# EAGLE board EEZ DIB module template (isolated) (EAGLE 7.2.0)
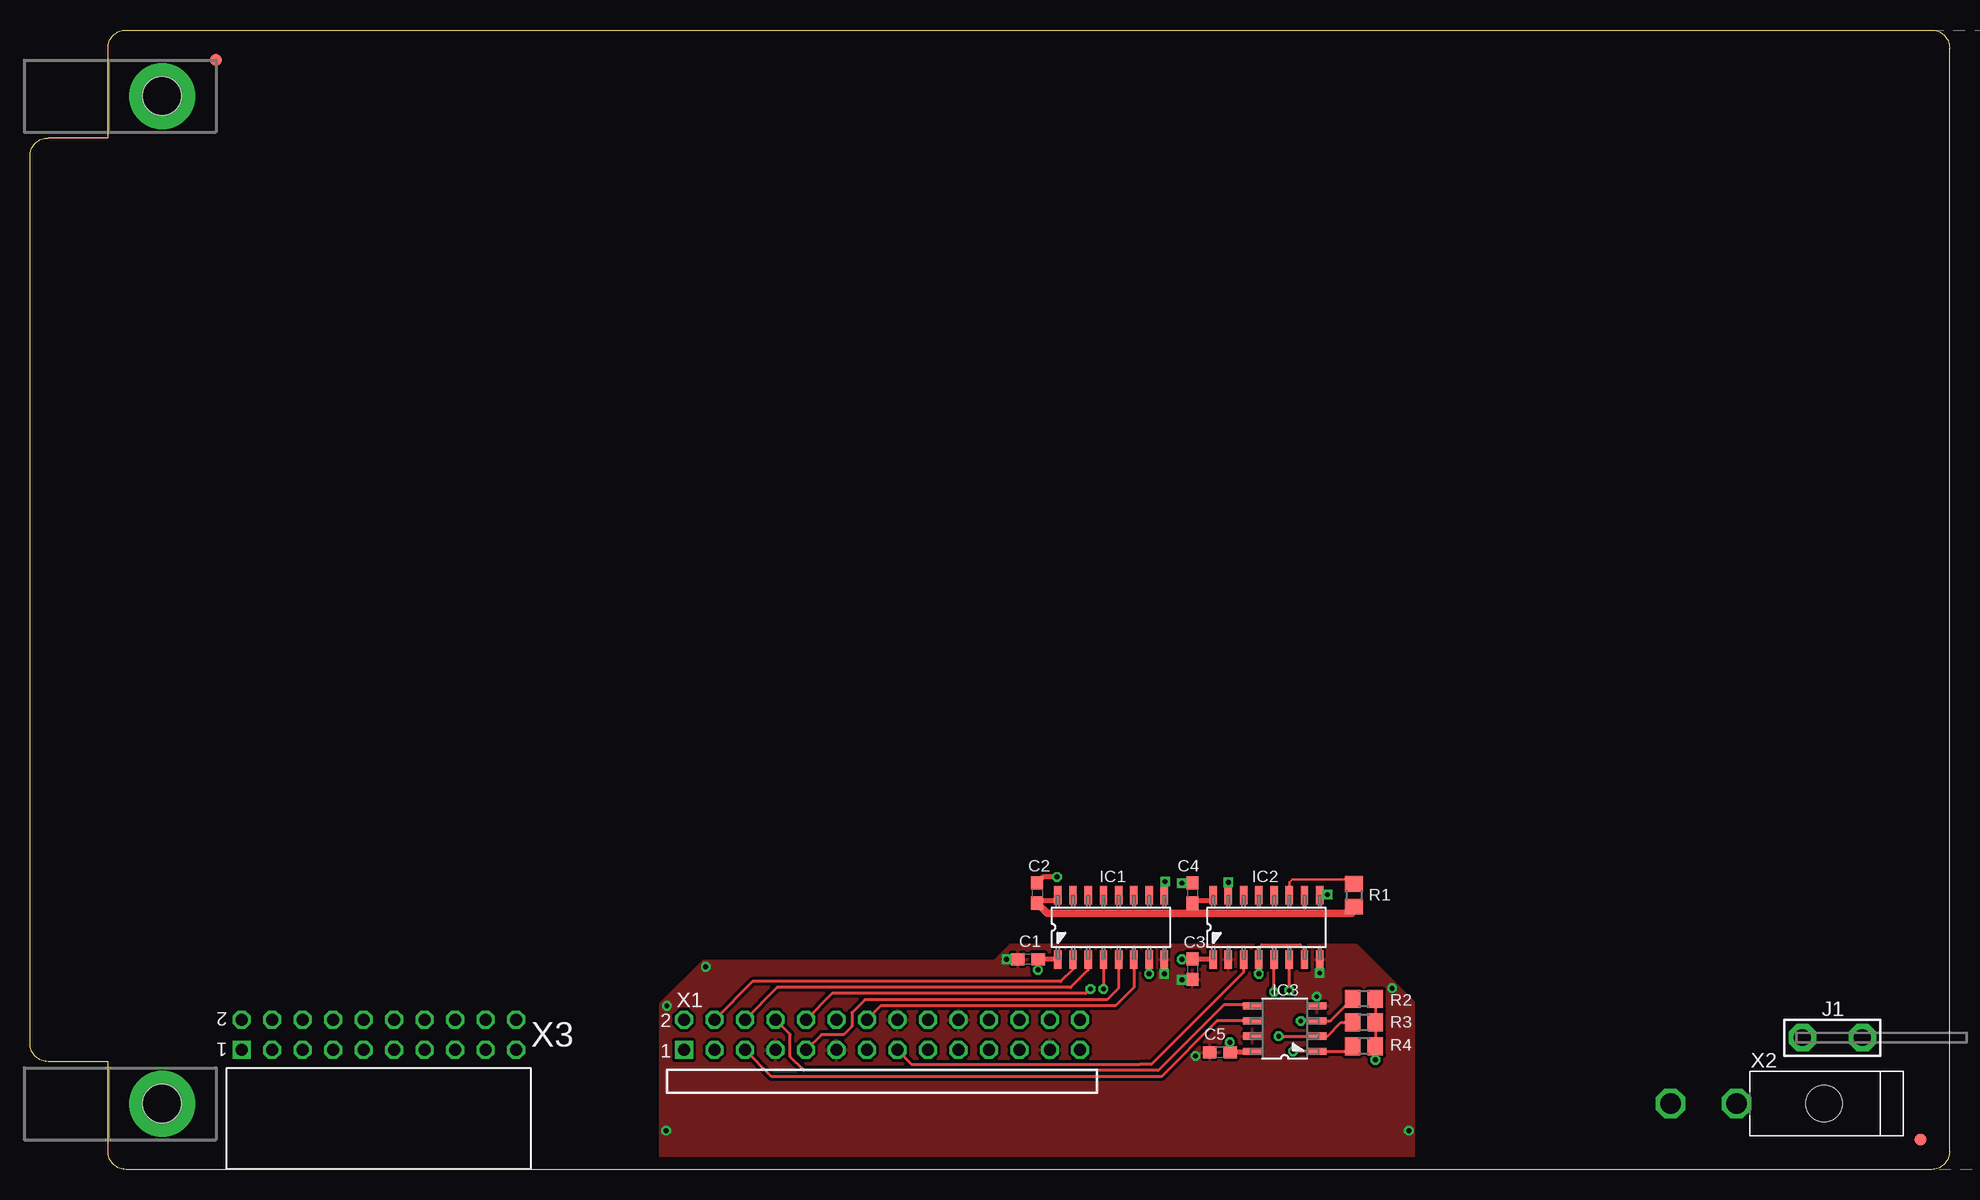
[diagram p0: board, top side]
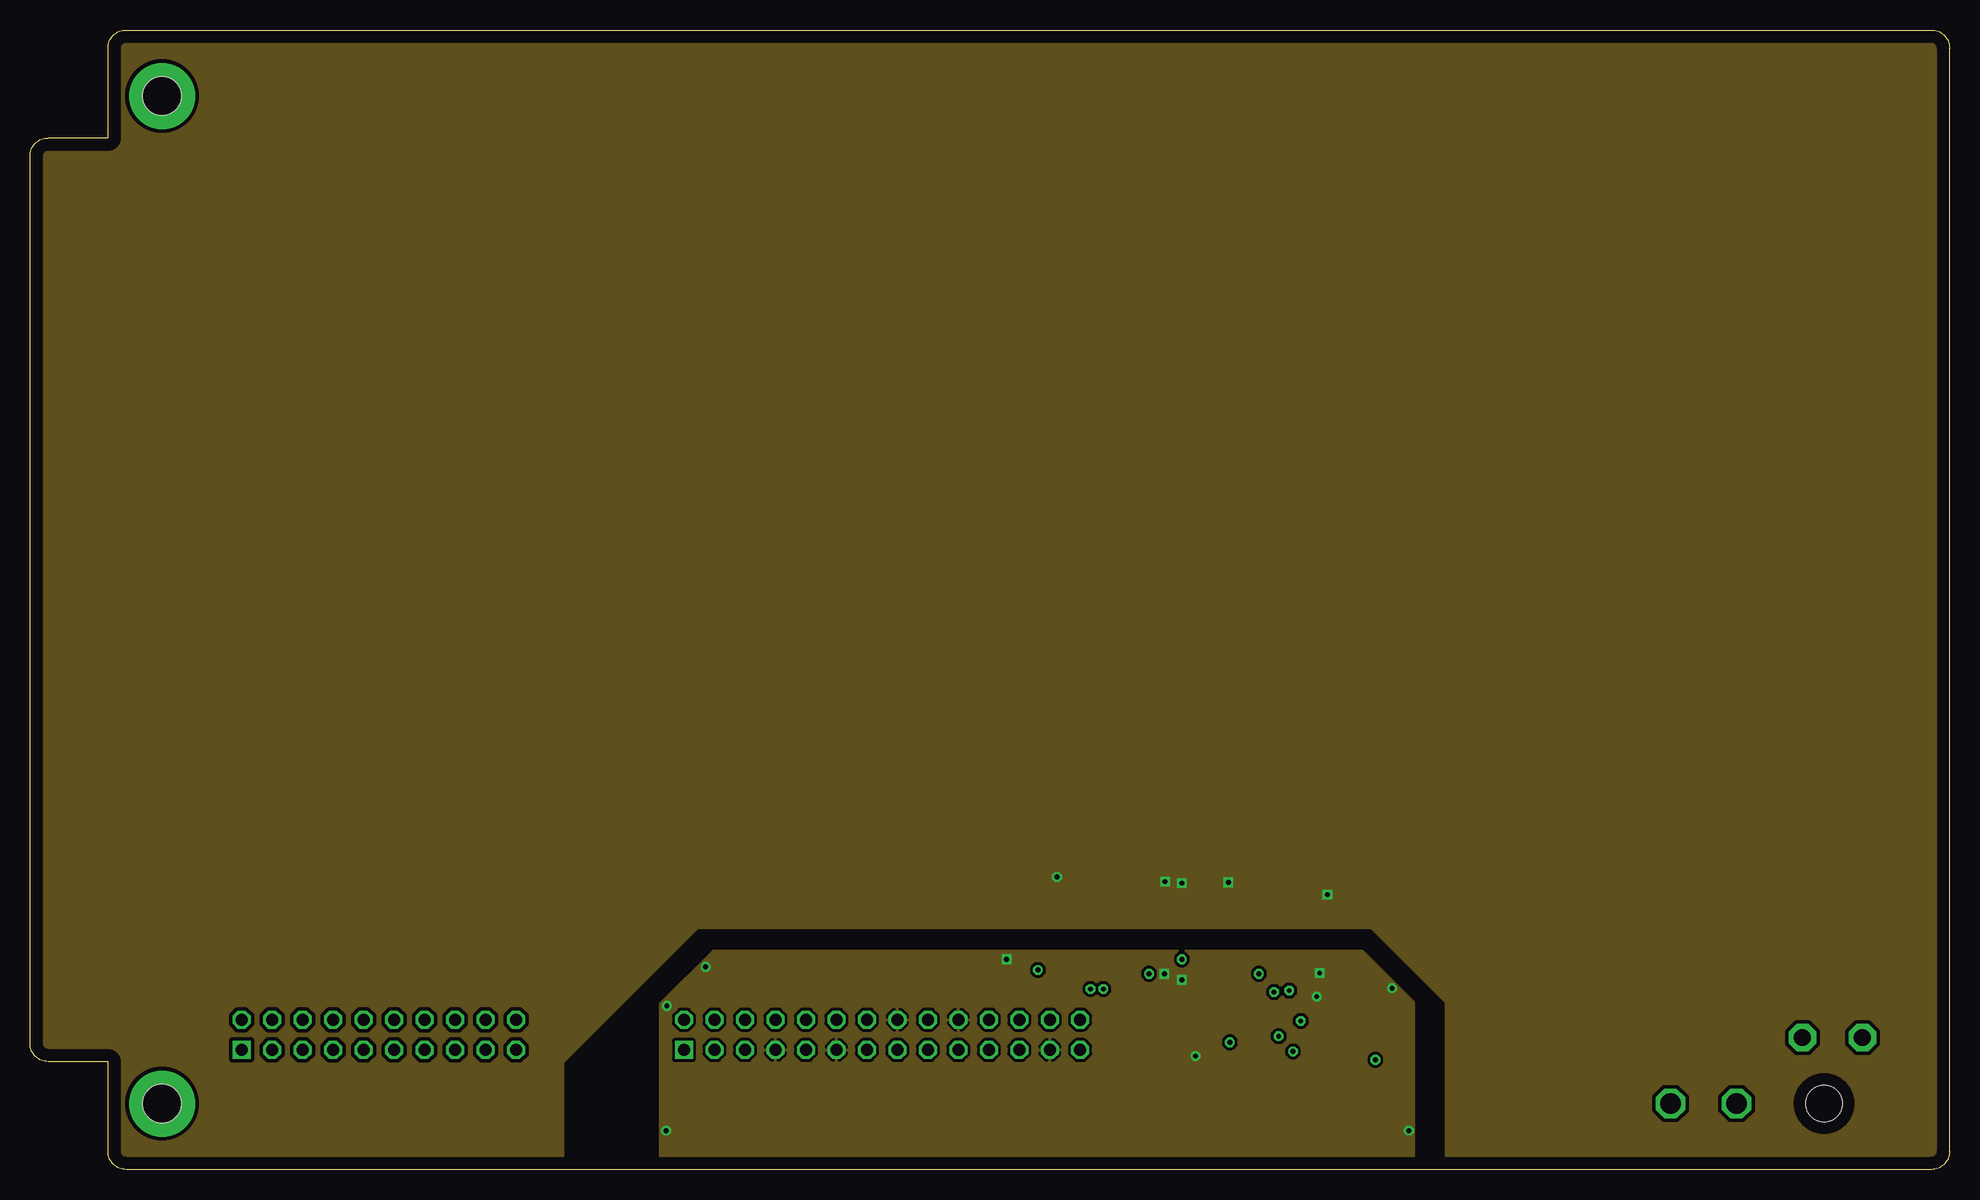
[diagram p1: board, inner layer L2]
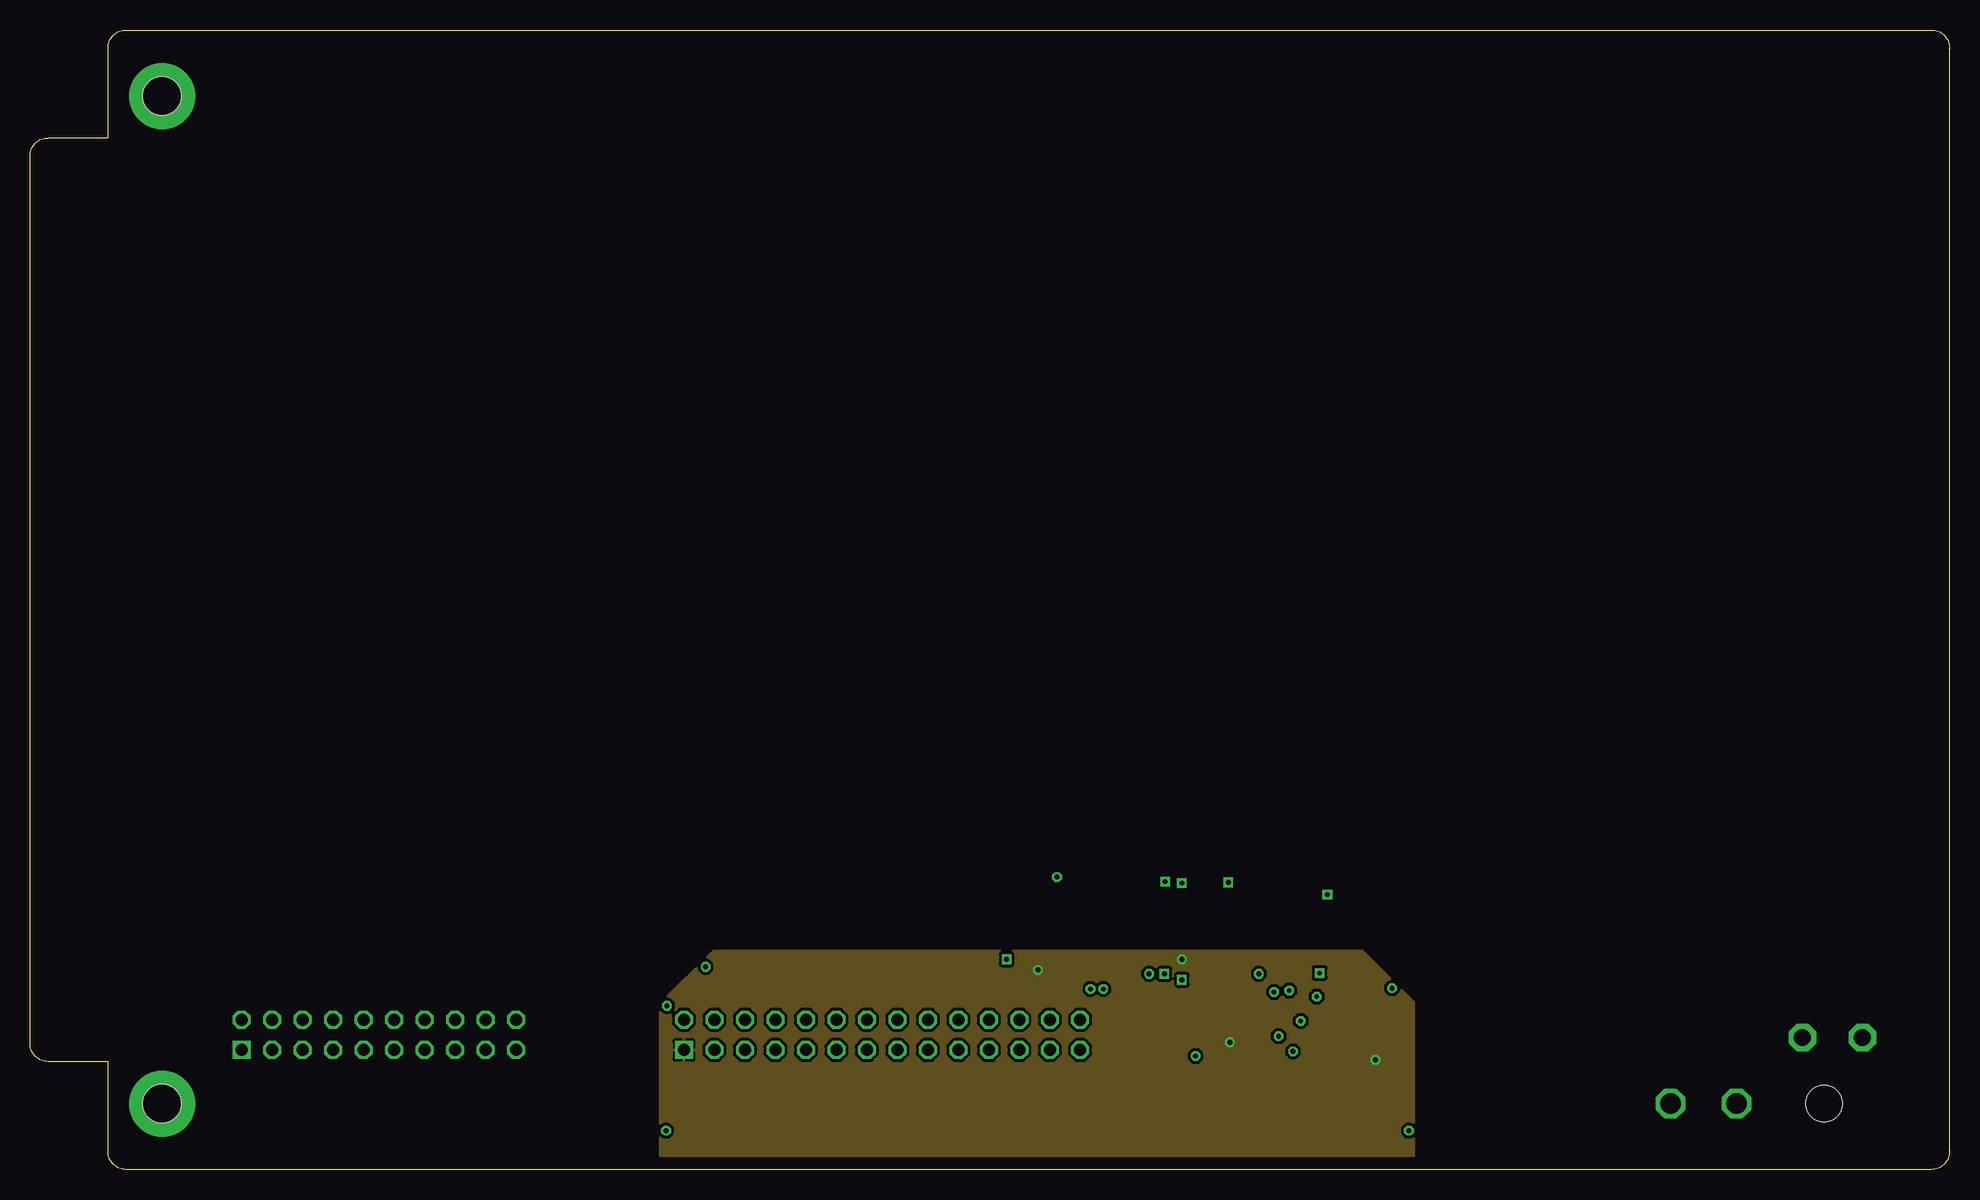
[diagram p2: board, inner layer L3]
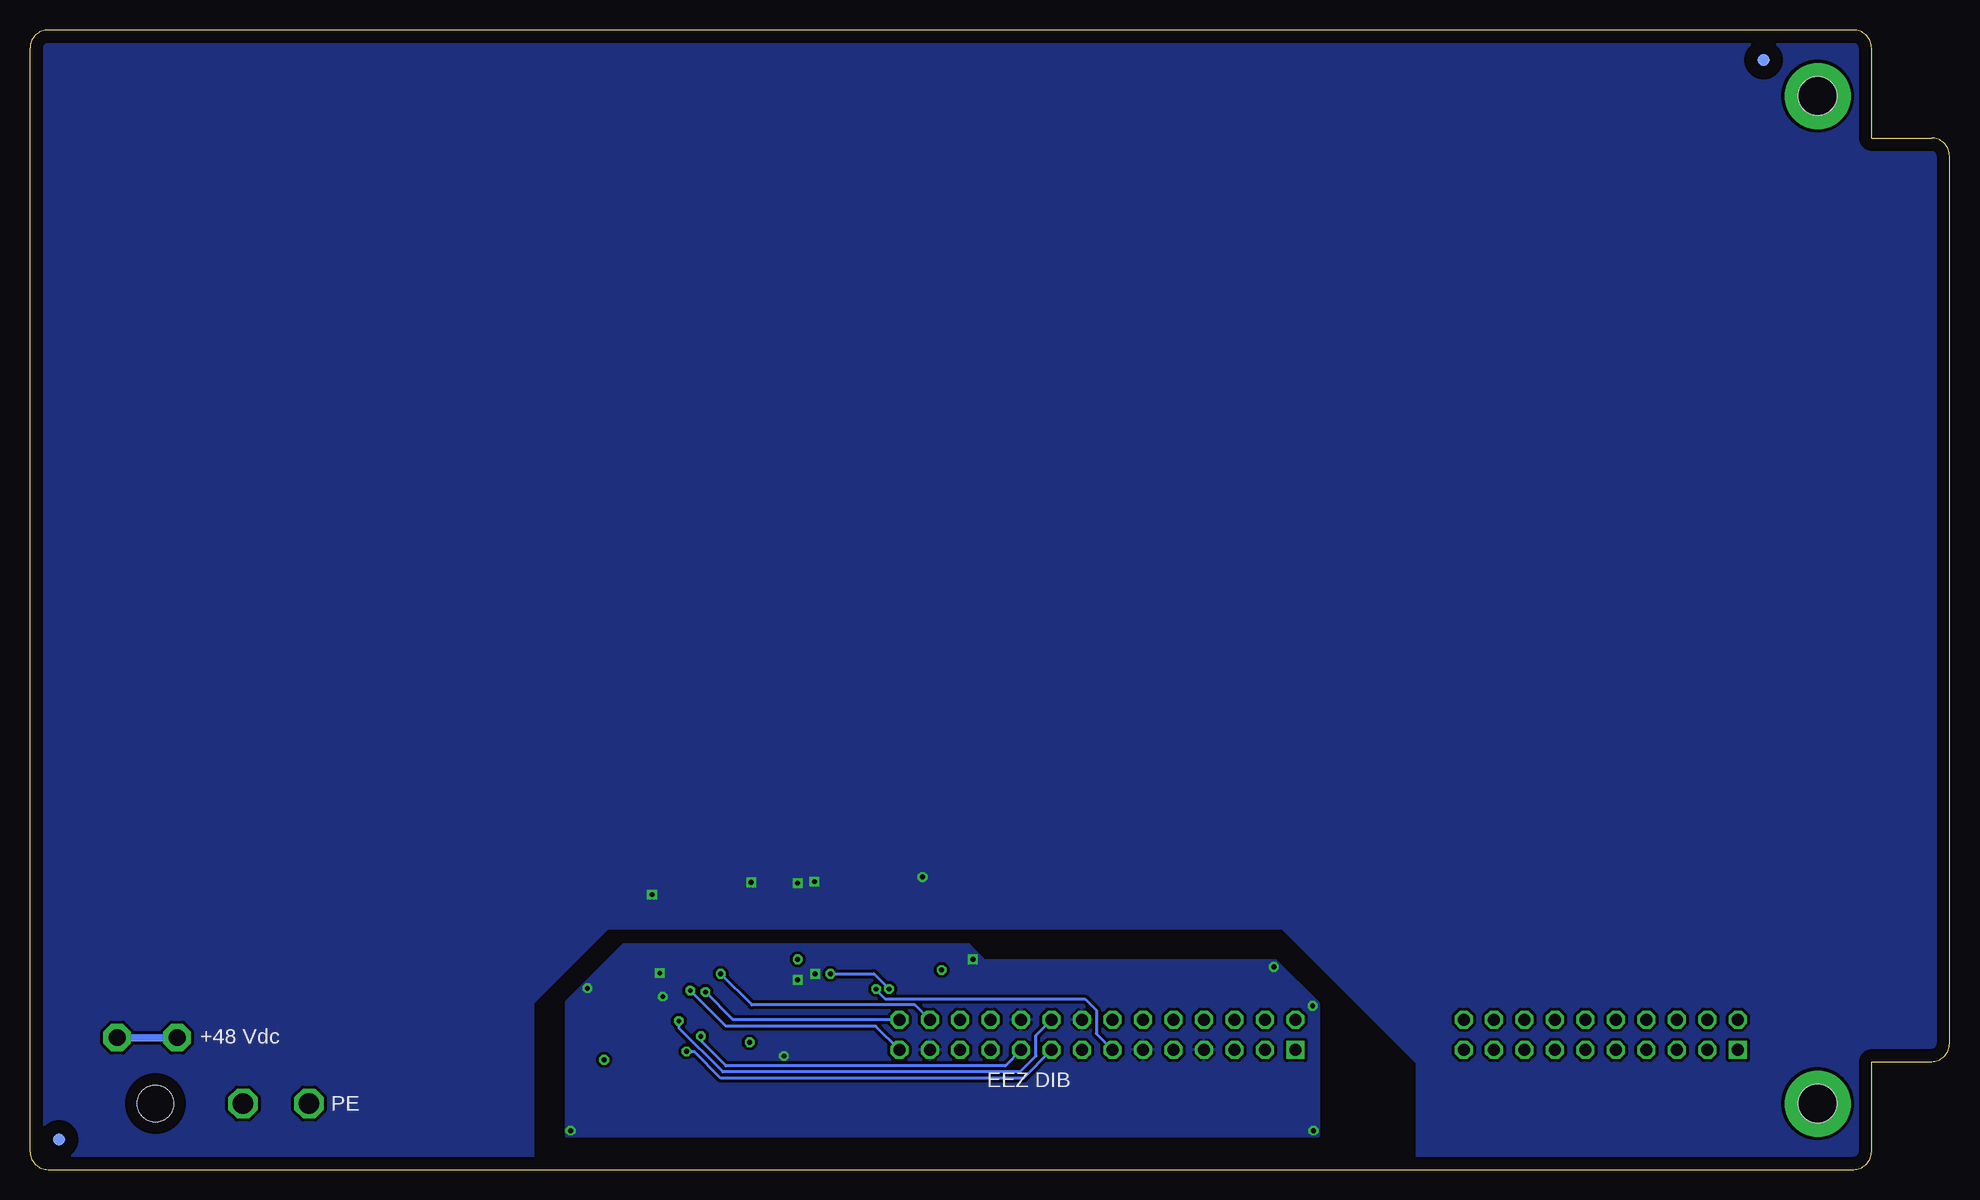
[diagram p3: board, bottom side, seen from below]

Size 160 x 95 mm. Coordinates in mm from the lower left corner, seen from the top.
Outline: 8,95 158.5,95 arc-90 160,93.5 160,1.5 arc-90 158.5,0 158,0 8,0 arc-90 6.5,1.5 6.5,9 1.5,9 arc-90 0,10.5 0,84.5 arc-90 1.5,86 6.5,86 6.5,93.5 arc-90 8,95
Copper layers (1+2+15+16): Top 0.035mm / dielectric 7mil / L2 0.03mm / dielectric 44mil / L3 0.03mm / dielectric 7mil / Bottom 0.035mm
Design rules "default *": minimum track width 6mil, minimum drill 0.3mm, track to track 6mil, track to pad 6mil, pad to pad 6mil, via to via 6mil, smd to smd 6mil, copper to edge 40mil, drill to drill 8mil, minimum pad ring 4mil, minimum via ring 8mil, stop-mask expansion 2.5mil, vias tented up to drill 1mm, thermal gap 8mil
Net classes: 0 default: width 0.203 mm, drill 0.3 mm, clearance 0.203 mm; 1 lvds: width 0.152 mm, drill 0.3 mm, clearance 0.152 mm to class 0, clearance 0.152 mm; 2 gnd: width 0.254 mm, drill 0.584 mm, clearance 0.254 mm
vRestrict: area 53,0 to 128,8.5

## Footprints (pad centres in the part's own frame; a part is rotated, then mirrored left to right if it is on the bottom)
C0603 = smd 1.1 x 1: 1 -0.85,0; 2 0.85,0
FIDUCIAL_DUAL = smd 1.016 x 1.016 bottom: B 0,0 | smd 1.016 x 1.016: T 0,0
SOIC-16 = smd 1.549 x 0.61: 1 -2.692,4.445; 2 -2.692,3.175; 3 -2.692,1.905; 4 -2.692,0.635; 5 -2.692,-0.635; 6 -2.692,-1.905; 7 -2.692,-3.175; 8 -2.692,-4.445; 9 2.692,-4.445; 10 2.692,-3.175; 11 2.692,-1.905; 12 2.692,-0.635; 13 2.692,0.635; 14 2.692,1.905; 15 2.692,3.175; 16 2.692,4.445
SOIC127P600X173-8N = smd 1.55 x 0.6: 1 -2.7,1.9; 2 -2.7,0.63; 3 -2.7,-0.64; 4 -2.7,-1.91; 5 2.7,-1.91; 6 2.7,-0.64; 7 2.7,0.63; 8 2.7,1.9
PCB_TAB-4907 = drill 1.4 pad 2.3 octagon: 1 -2.5,0; 2 2.5,0
PCB-MB = hole 3.2: 0,0
R0805 = smd 1.3 x 1.5: 1 -0.95,0; 2 0.95,0
77317-104-28LF = drill 1 pad 1.5 square: 1 -33.02,-2.54 | drill 1 pad 1.5 octagon: 2 -33.02,0; 3 -30.48,-2.54; 4 -30.48,0; 5 -27.94,-2.54; 6 -27.94,0; 7 -25.4,-2.54; 8 -25.4,0; 9 -22.86,-2.54; 10 -22.86,0; 11 -20.32,-2.54; 12 -20.32,0; 13 -17.78,-2.54; 14 -17.78,0; 15 -15.24,-2.54; 16 -15.24,0; 17 -12.7,-2.54; 18 -12.7,0; 19 -10.16,-2.54; 20 -10.16,0; 21 -7.62,-2.54; 22 -7.62,0; 23 -5.08,-2.54; 24 -5.08,0; 25 -2.54,-2.54; 26 -2.54,0; 27 0,-2.54; 28 0,0
MINIFIT_39301020 = drill 1.7 octagon: 1 0,0; 2 0,5.5 | hole 3: 0,-7.3
SSW-110-02-T-D-RA = drill 1 pad 1.5 square: 1 22.86,2.54 | drill 1 pad 1.5 octagon: 2 22.86,0; 3 20.32,2.54; 4 20.32,0; 5 17.78,2.54; 6 17.78,0; 7 15.24,2.54; 8 15.24,0; 9 12.7,2.54; 10 12.7,0; 11 10.16,2.54; 12 10.16,0; 13 7.62,2.54; 14 7.62,0; 15 5.08,2.54; 16 5.08,0; 17 2.54,2.54; 18 2.54,0; 19 0,2.54; 20 0,0

## Placement (x,y rotation side)
C1  100n  [C0603]  83.19,17.53 180 top
C2  100n  [C0603]  83.95,23.05 270 top
C3  100n  [C0603]  96.9,16.7 270 top
C4  100n  [C0603]  96.9,23.05 270 top
C5  100n  [C0603]  99.19,9.78 0 top
FM1  FIDUCIAL_2  [FIDUCIAL_DUAL]  15.5,92.5 0 top
FM2  FIDUCIAL_2  [FIDUCIAL_DUAL]  157.58,2.5 0 top
IC1  Si8662AB-B-IS1  [SOIC-16]  90.11,20.19 90 top
IC2  Si8641AB-B-IS1  [SOIC-16]  103.06,20.19 90 top
IC3  M24C32-WMN6P  [SOIC127P600X173-8N]  104.58,11.75 180 top
J1  4907  [PCB_TAB-4907]  150.24,11 180 top
KK1  PMB-1  [PCB-MB]  11,89.5 0 top
KK2  PMB-1  [PCB-MB]  11,5.5 0 top
R1  10K  [R0805]  110.36,22.86 270 top
R2  10K  [R0805]  111.19,14.22 180 top
R3  10K  [R0805]  111.19,12.26 180 top
R4  10K  [R0805]  111.19,10.29 180 top
X1  77317-104-28LF  [77317-104-28LF]  87.54,12.5 0 top
X2  39-30-1020  [MINIFIT_39301020]  142.24,5.5 90 top
X3  ZL263-20DG  [SSW-110-02-T-D-RA]  40.5,12.5 180 top

## Library data of the parts
C1-C5 R1-R4 = rcl
FM1 FM2 IC1-IC3 KK1 KK2 = EEZ_Lib1
J1 X1-X3 = EEZ_connectors

## Nets
!RESET: IC1.15
+3V3: C2.2 C4.2 IC1.16 IC2.10 IC2.16 R1.2
+VAUX: X1.2
BOOT0: IC2.13
DIB_A0: IC3.1 R4.2 X1.17
DIB_A1: IC3.2 R3.2 X1.19
DIB_A2: IC3.3 R2.2 X1.18
DIB_BOOT0: IC2.4 IC2.7 X1.26
DIB_CSA: IC1.5 X1.9
DIB_CSB: X1.12
DIB_IRQ: IC1.7 X1.10
DIB_MISO: IC1.6 X1.14
DIB_MOSI: IC2.3 X1.15
DIB_NFAULT: X1.3
DIB_NRESET: IC1.2 X1.4
DIB_SCL: IC3.6 X1.5
DIB_SCLK: IC1.4 X1.13
DIB_SDA: IC3.5 X1.8
DIB_SYNC: IC1.3 X1.6
DIB_UART_RX: IC2.6 X1.27
DIB_UART_TX: IC2.5 X1.28
GND: C2.1 C4.1 IC1.9 IC2.9 IC2.15
GNDIO: C1.2 C3.2 C5.1 IC1.8 IC2.2 IC2.8 IC3.4 IC3.7 X1.7 X1.11 X1.16 X1.20 X1.25
IRQ: IC1.10
MISO: IC1.11
MOSI: IC2.14
NSS: IC1.12
OE_SYNC: IC1.14
PE: J1.1 J1.2
SCLK: IC1.13
UART_RX: IC2.12
UART_TX: IC2.11 R1.1
V+: C1.1 C3.1 C5.2 IC1.1 IC2.1 IC3.8 R2.1 R3.1 R4.1 X1.1

## Tracks (layer width: path | path; a pad name or v marks a point on that pad's centre or on a via)
+3V3
  Top 0.254: R1.2 110.36,21.59 110.3,21.4 110.24,21.4 110.17,21.34 | IC2.10 106.24,21.4 106.17,21.34
  Top 0.406: IC2.16 98.61,22.35 98.58,22.39 97.09,22.39 C4.2 96.9,21.34 | IC1.16 85.66,22.42 84.16,22.42 C2.2
  Top 0.61: 110.17,21.34 106.17,21.34 96.9,21.34 84.8,21.34 C2.2
DIB_A0  (via drill 0.4)
  Top 0.254: v105.28,9.84 IC3.1 109.8,9.85 R4.2
  Bottom 0.254: X1.17 77.18,7.62 102.42,7.62 104.65,9.84 v105.28,9.84
DIB_A1  (via drill 0.4)
  Top 0.254: v104.08,11.11 IC3.2 108.14,11.12 109.28,12.26 R3.2
  Bottom 0.254: X1.19 78.7,8.64 101.98,8.64 104.08,10.73 v104.08,11.11
DIB_A2  (via drill 0.4)
  Top 0.254: IC3.3 | IC3.3 v105.92,12.39 v105.92,12.38 | IC3.3 108.4,12.39 R2.2
  Bottom 0.254: X1.18 76.14,11.2 76.14,9.46 77.47,8.13 102.23,8.13 105.92,11.81 v105.92,12.38
DIB_BOOT0  (via drill 0.4)
  Top 0.254: v102.42,16.32 IC2.4 102.42,18.48 102.68,18.73 105.86,18.73 106.24,18.35 IC2.7
  Bottom 0.254: v102.42,16.32 99.82,13.72 86.23,13.72 85.02,12.5 X1.26
DIB_CSA
  Top 0.254: IC1.5 90.74,15.11 89.79,14.16 69.6,14.16 68.52,13.08 68.52,11.94 67.82,11.24 65.96,11.24 X1.9
DIB_IRQ  (via drill 0.4)
  Top 0.254: v93.28,16.32 IC1.7 | v88.39,15.05 88.01,14.67 66.85,14.67 X1.10
  Bottom 0.254: v93.28,16.32 89.66,16.32 v88.39,15.05
DIB_MISO
  Top 0.254: IC1.6 92.01,15.18 90.49,13.65 70.91,13.65 X1.14
DIB_MOSI
  Top 0.254: IC2.3 101.16,16.45 93.47,8.76 92.52,8.76 91.19,8.76 73.5,8.76 X1.15
DIB_NRESET
  Top 0.254: IC1.2 86.93,16.7 85.92,15.68 60.24,15.68 X1.4
DIB_SCL
  Top 0.203: IC3.6 102.49,12.39
  Top 0.254: IC3.6 98.93,12.38 94.3,7.75 61.81,7.75 X1.5
DIB_SCLK  (via drill 0.4)
  Top 0.254: IC1.4 v89.47,15.05
  Bottom 0.254: v89.47,15.05 89.47,14.99 88.71,14.22 72.07,14.22 71.12,13.27 71.12,11.32 X1.13
DIB_SDA
  Top 0.254: IC3.5 101.83,13.72 99.5,13.72 94.04,8.26 64.52,8.26 63.37,9.4 63.37,11.27 X1.8
DIB_SYNC
  Top 0.254: IC1.3 88.2,16.64 86.74,15.18 62.28,15.18 X1.6
DIB_UART_RX  (via drill 0.4)
  Top 0.254: v104.97,14.92 IC2.6
  Bottom 0.254: X1.27 89.52,11.94 101.98,11.94 v104.97,14.92
DIB_UART_TX  (via drill 0.4)
  Top 0.254: 103.69,17.08 IC2.5 v103.69,14.8
  Bottom 0.254: X1.28 101.4,12.5 v103.69,14.8
GND  (via drill 0.4)
  Top 0.254: v99.89,23.94 IC2.15 | C4.1 96.04,23.9 v96.01,23.88 | IC2.9 108.1,22.89 v108.14,22.92
  Top 0.406: v94.61,24 94.59,22.86 IC1.9 | v85.6,24.38 84.43,24.38 C2.1
  pour L2 (isolate 0.305, rank 2): -0.13,95 160.53,95 160.53,0 118.05,0 118.05,13.91 111.82,20.13 55.63,20.13 44.39,8.89 44.39,0.25 0.19,-0.19
  pour Bottom (isolate 0.254, rank 2): -0.13,94.74 160.02,94.74 160.02,0 118.05,-0.06 118.05,13.91 111.82,20.13 55.63,20.13 44.39,8.89 44.39,-0.25 0,-0.25
GNDIO  (via drill 0.4)
  Top 0.254: IC3.7 101.89,11.14 101.98,11.24
  other vias: 97.16,9.46 107.25,14.41 56.32,16.89 114.94,3.24 53.02,3.24 113.54,15.11 81.41,17.53 94.55,16.32 96.01,15.81 107.51,16.38 53.09,13.65
  pour Bottom (isolate 0.254): 52.58,2.79 52.58,13.84 56.13,17.4 80.39,17.4 81.72,18.73 110.55,18.73 115.32,13.97 115.32,2.79
  pour Top (isolate 0.254): 52.58,0.13 52.58,13.84 56.13,17.4 80.39,17.4 81.72,18.73 110.55,18.73 115.32,13.97 115.32,0.13
  pour L2 (isolate 0.254): 52.58,0.44 52.58,13.84 56.96,18.22 111.06,18.22 115.32,13.97 115.32,0.44
HOLE_DL  (via drill 3.2 pad 5.5)
  other vias: 11,5.5
HOLE_UL  (via drill 3.2 pad 5.5)
  other vias: 11,89.5
PE
  Bottom 0.61: J1.1 J1.2
UART_TX
  Top 0.203: IC2.11 104.97,23.94 105.22,24.19 109.98,24.19 R1.1
V+  (via drill 0.4)
  Top 0.254: R2.1 R3.1 R4.1 v112.14,9.15 v112.14,9.14 | C1.1 84.03,16.66 v84.01,16.64 | C5.2 100.04,10.58 v100.01,10.6
  Top 0.406: IC2.1 98.57,17.55 C3.1 96.88,17.53 v96.01,17.53 | IC3.8 101.82,9.78 C5.2 | IC1.1 85.64,17.53 C1.1
  pour L3 (isolate 0.254): 52.58,0.44 52.58,13.84 56.96,18.22 111.06,18.22 115.32,13.97 115.32,0.44

## Text on the board
bPlace: +48 Vdc | EEZ DIB | PE
tDocu: Max. module width / (for EEZ BB3 chassis!)